# Altium PCB HAB_RADIO_BOARD.PcbDoc
Units mil, origin at the board's own origin, x right, y up, seen from the top; angles counter-clockwise.
Board outline 3149.61 x 1574.8 mil, 4 copper layers (Top Layer, GND Plane, PWR Plane, Bottom Layer), stack 61.811 mil thick; 5 components, 10 nets, 73 pads, 3 vias.
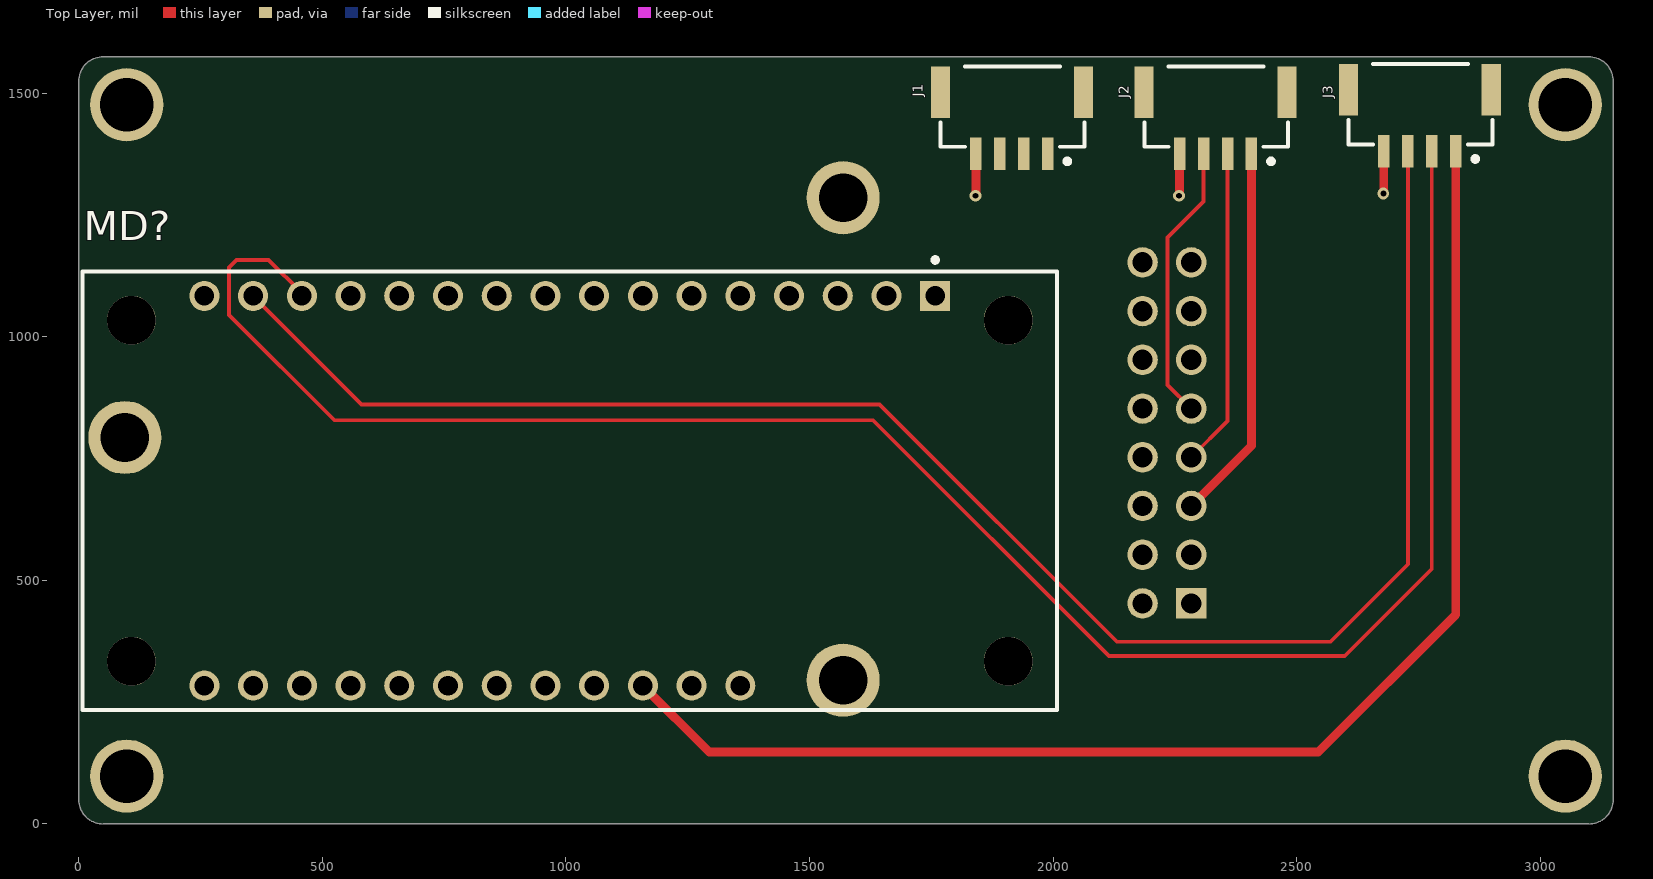
[diagram p0: Top Layer view]
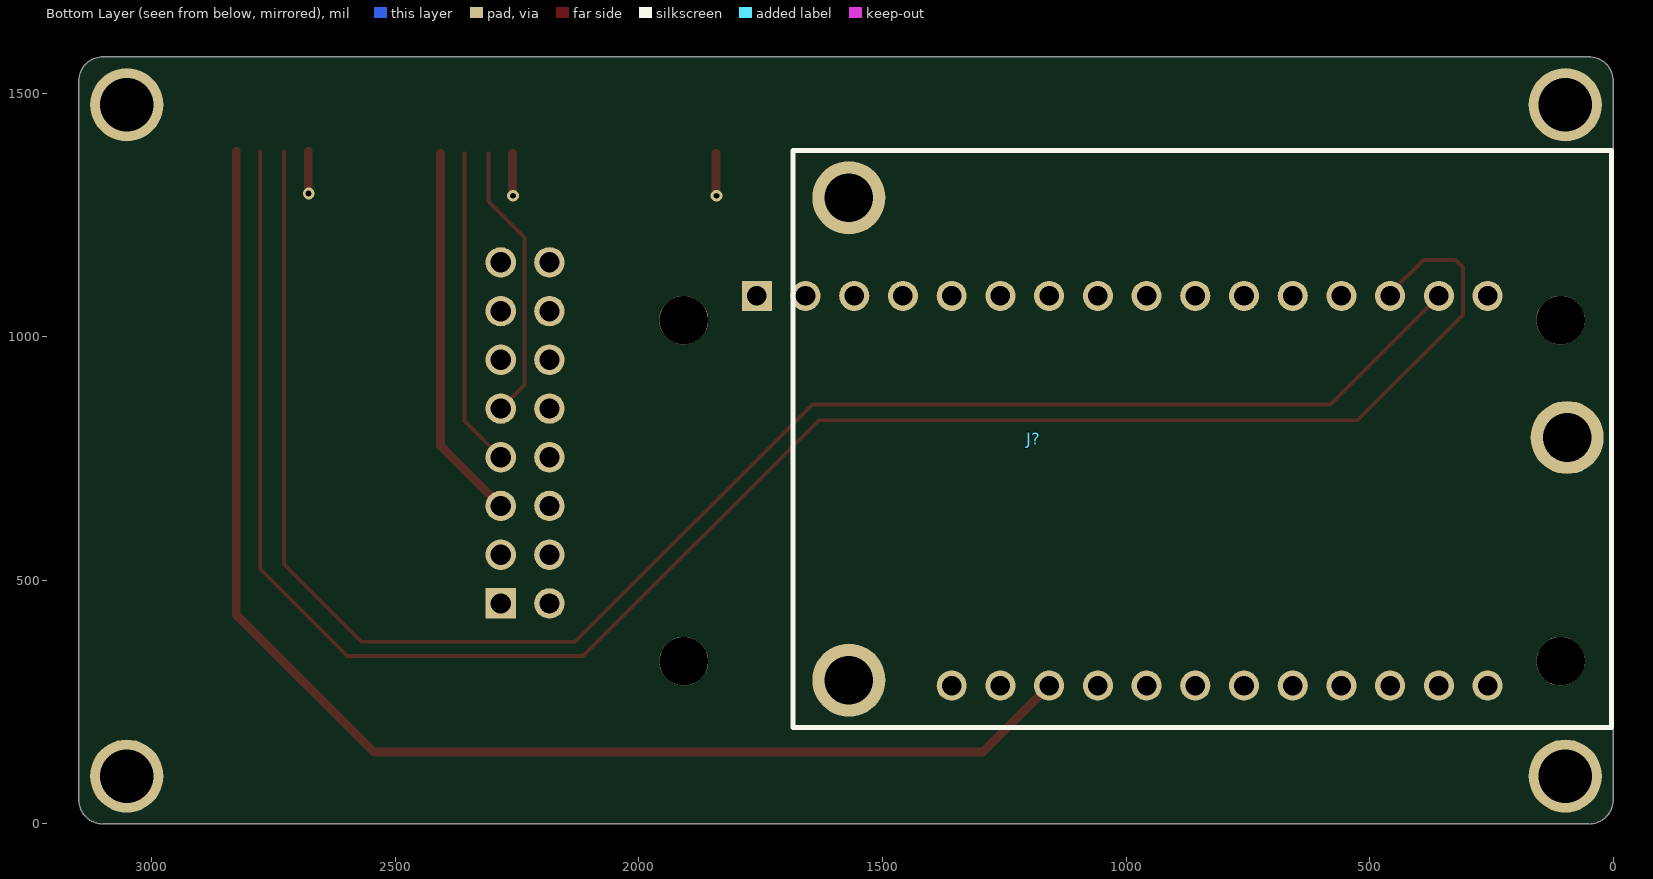
[diagram p1: Bottom Layer view, seen from below]
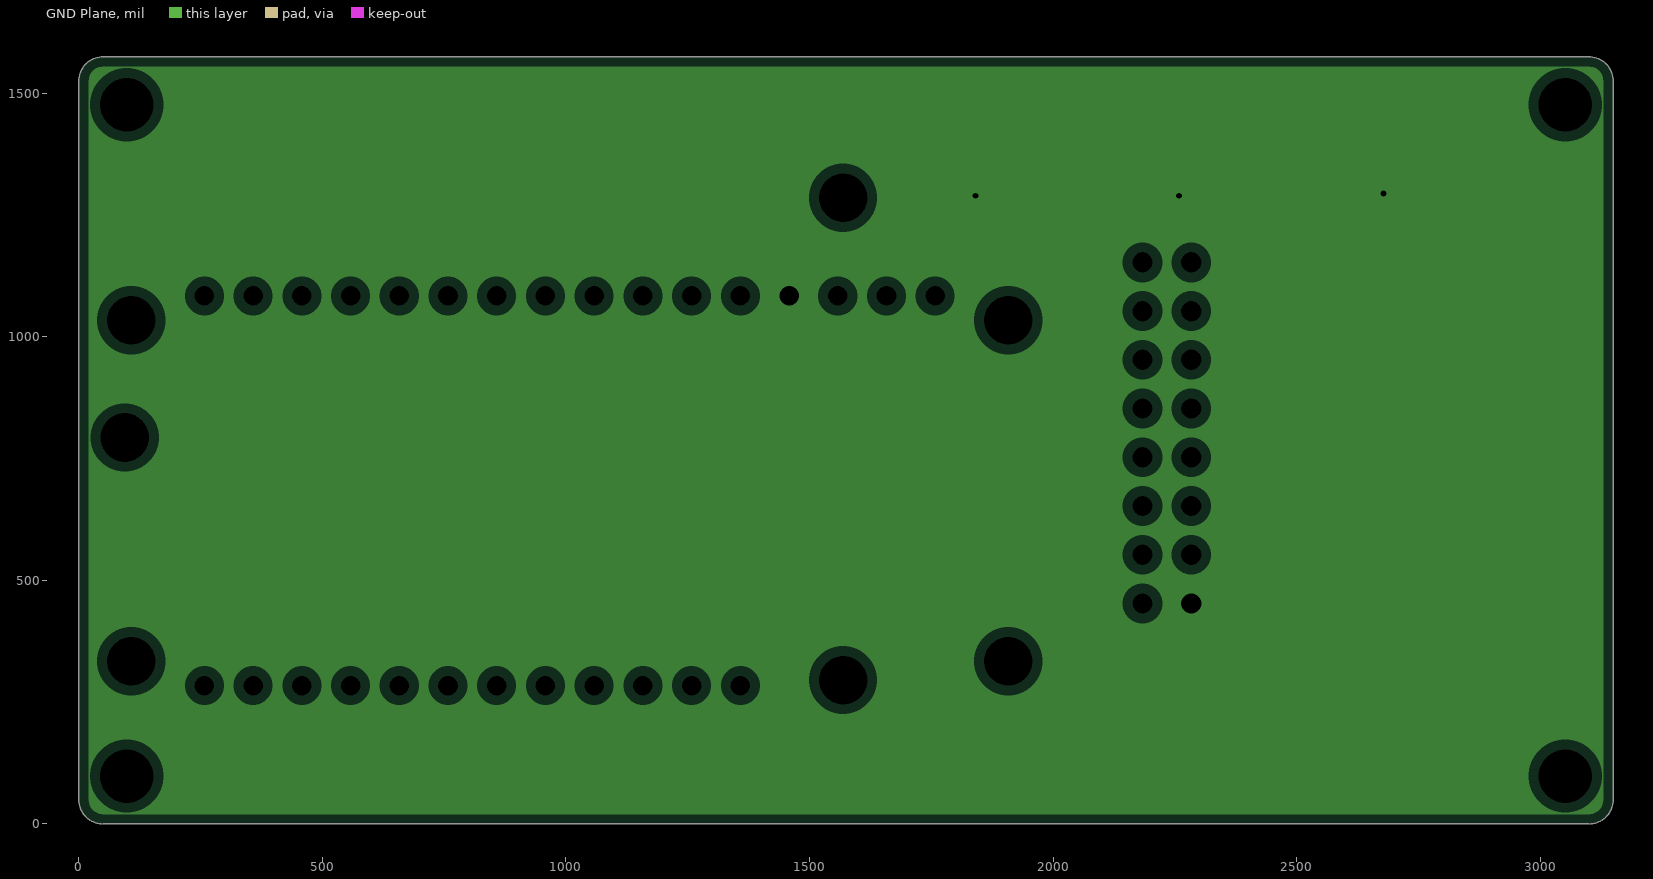
[diagram p2: GND Plane, clearances drawn from the general rule]
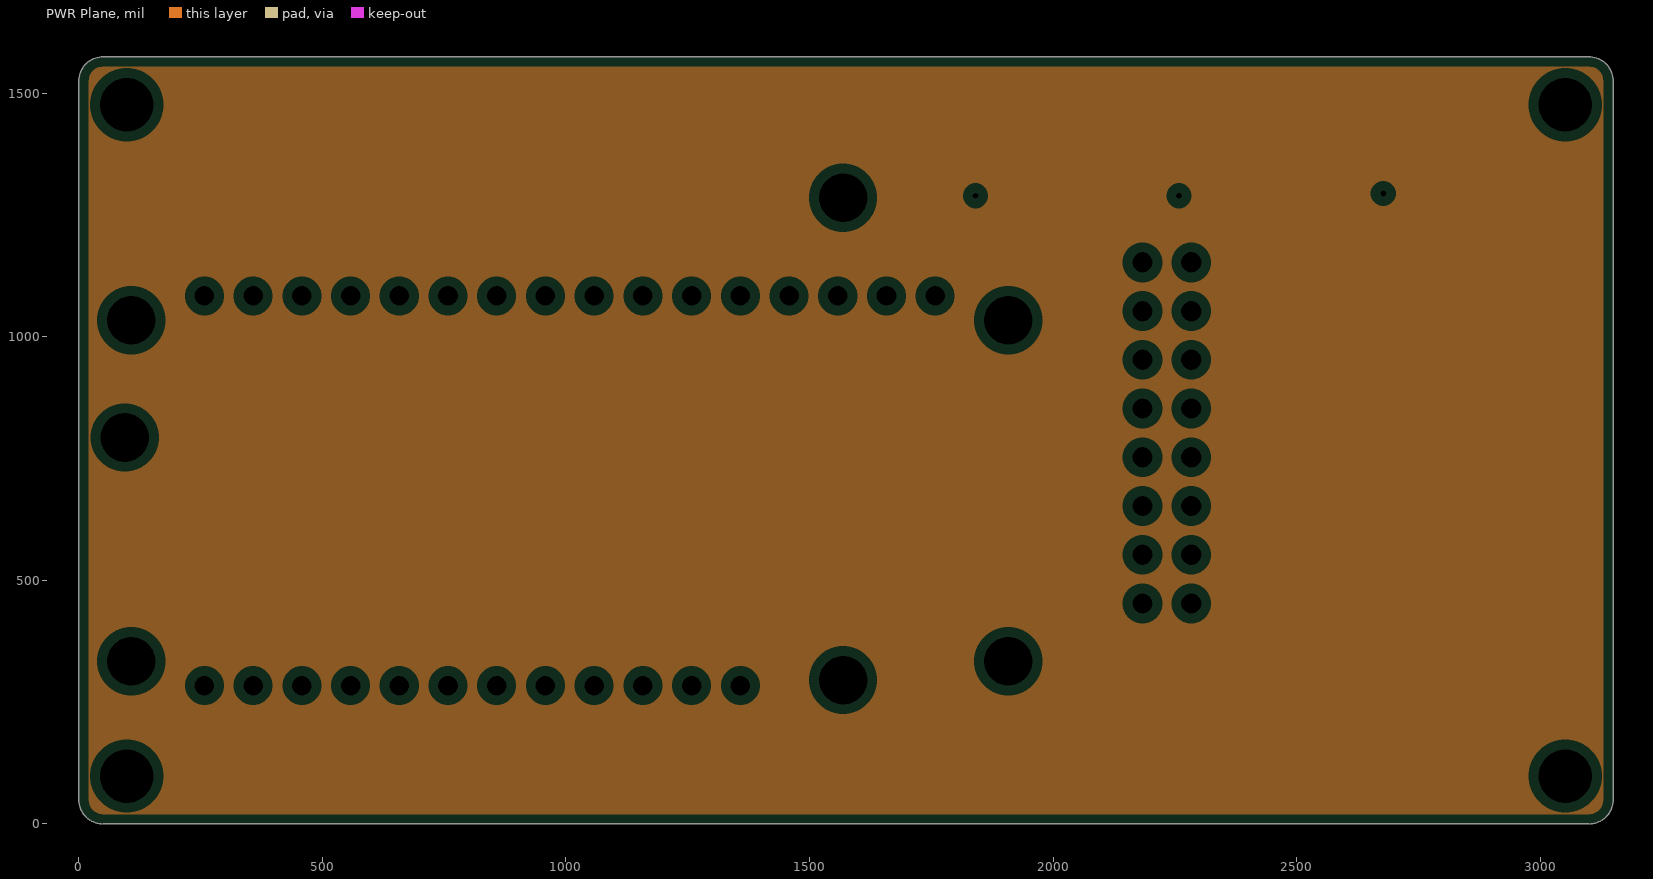
[diagram p3: PWR Plane, clearances drawn from the general rule]
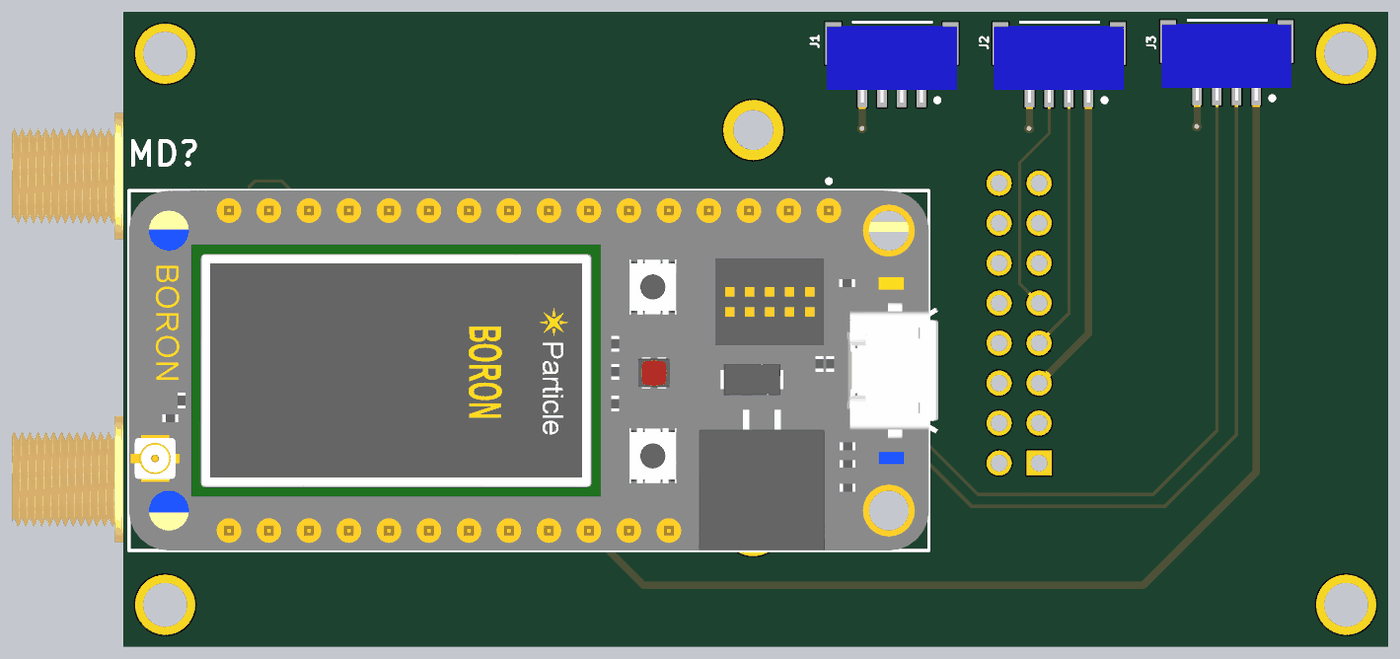
[diagram p4: 3D render of the assembled board from above, using the file's embedded part models]

## Layer stack, top to bottom
Top Solder: solder mask 1, SM-001, Dk 4
Top Layer: signal copper 1.378
Dielectric 2: prepreg 7.874, PP-006, Dk 4.1
GND Plane: plane copper 0.689, net GND
Dielectric 1: core 41.9291, Core-043, Dk 4.3
PWR Plane: plane copper 0.689
Dielectric 3: prepreg 7.874, PP-006, Dk 4.1
Bottom Layer: signal copper 1.378
Bottom Solder: solder mask 1, SM-001, Dk 4

## Board outline
0,50 0,1524.8 cw(c50,1524.8) 50,1574.8 3099.61,1574.8 cw(c3099.61,1524.8) 3149.61,1524.8 3149.61,50 cw(c3099.61,50) 3099.61,0 50,0 cw(c50,50)

## Design rules (kind name [scope] priority, off if disabled: settings)
Clearance [All] p1: gap=10 ignorepadtopadclearanceinfootprint=FALSE except(0: Arc-Hole Track-Hole SMDPad-Hole THPad-Hole Via-Hole Fill-Hole Poly-Hole Region-Hole Text-Hole)
PlaneClearance [All] p1: clearance=20
PlaneConnect [All] p1: planeconnectstyle=Relief reliefexpansion=20 reliefentries=4 reliefconductorwidth=10 reliefairgap=10
PolygonConnect [All] p1: connectstyle=Relief reliefconductorwidth=10 reliefentries=4 polygonreliefangle="90 Angle" airgapwidth=10
RoutingVias [All] p1: holewidth=12 width=24 viastyle="Through Hole" minholewidth=12 minwidth=24 maxholewidth=12 maxwidth=24
SolderMaskExpansion [All] p1: expansion=4 istentingtop=FALSE
Width [All] p1: maxlimit=100 minlimit=8 preferedwidth=8
28 further rules are at their usual default settings.

## Classes and differential pairs
component class "[05] RADIOS": J? MD?
component class "[04] CONNECTORS": J1 J2 J3

## Components (designator, comment, footprint, x,y, rotation, side; value= is the part's Value field where it differs from the comment)
J1 "JST-GH 4 Pos RA" SM04B-GHS-TB(LF)(SN)- 1989.17,1555.12 r180 top
J2 "JST-GH 4 Pos RA" SM04B-GHS-TB(LF)(SN)- 2407.09,1555.12 r180 top
J3 "JST-GH 4 Pos RA" SM04B-GHS-TB(LF)(SN)- 2826.38,1560.04 r180 top
J? "RFD900/X/+" RFD900 2283.46,452.76 r90 bottom
MD? "BRN402" FP-BRN402-0 1007.87,684.06 r270 top

## Footprints (in the part's own frame and the unit in brackets; to place one, negate y for a bottom-side part, rotate by r counter-clockwise, add the part's x,y. Pads: shape width x height; smd on the part's side, far side on the other; paste and mask are expansions set on the pad)
FP-BRN402-0 [mm]
  rect 1.57x1.57 hole 1.02 paste-1000 mask+0: 1(-10.16,19.05)
  round 1.57 hole 1.02 paste-1000 mask+0: 2(-10.16,16.51) 3(-10.16,13.97) 4(-10.16,11.43) 5(-10.16,8.89) 6(-10.16,6.35) 7(-10.16,3.81) 8(-10.16,1.27) 9(-10.16,-1.27) 10(-10.16,-3.81) 11(-10.16,-6.35) 12(-10.16,-8.89) 13(-10.16,-11.43) 14(-10.16,-13.97) 15(-10.16,-16.51) 16(-10.16,-19.05) 17(10.16,-19.05) 18(10.16,-16.51) 19(10.16,-13.97) 20(10.16,-11.43) 21(10.16,-8.89) 22(10.16,-6.35) 23(10.16,-3.81) 24(10.16,-1.27) 25(10.16,1.27) 26(10.16,3.81) 27(10.16,6.35) 28(10.16,8.89)
  round 2.54 hole 2.54 unplated paste-1000 mask+0: ""(-8.89,22.86) ""(-8.89,-22.86) ""(8.89,22.86) ""(8.89,-22.86)
  silkscreen extent -12.15,-25.4 11.43,25.4, body extent -11.53,-25.5 11.53,25.5, height 0.25
RFD900 [mm] "900MHz Data Modem"
  rect 1.59x1.59 hole 1.06 paste-1.59: 1(0,0)
  round 1.59 hole 1.06: 2(2.54,0) 4(7.62,0) 5(10.16,0) 6(12.7,0) 7(15.24,0) 8(17.78,0) 9(0,-2.54) 10(2.54,-2.54) 11(5.08,-2.54) 12(7.62,-2.54) 13(10.16,-2.54) 14(12.7,-2.54) 15(15.24,-2.54) 16(17.78,-2.54)
  round 1.59 hole 1.06 paste-1.59: 3(5.08,0)
  round 3.81 hole 2.54: GND(-4,-18.15) GND(8.65,-55.6) GND(21.15,-18.15)
  silkscreen extent -6.48,-57.91 23.62,-15.24, body extent -6.4,-65.2 23.6,-4.15, height 13.05
SM04B-GHS-TB(LF)(SN)- [mm] "JST-GH 4 POS RIGHT ANGLE"
  rect 0.6x1.7 smd: 1(0,4.55) 2(1.25,4.55) 3(2.5,4.55) 4(3.75,4.55)
  rect 1x2.7 smd: M(-1.85,1.35) M(5.6,1.35)
  silkscreen extent -1.91,0 5.59,5.08, body extent -2.25,0.25 6,5.1, height 4.35

## Part data
J1 J2 J3: library part SM04B-GHS-TB(LF)(SN)-, "JST-GH CONN HEADER SMD R/A 4 POS 1.25MM", Color=Natural, Manufacturer=JST, Supplier Part Number 1=455-1566-1-ND, Category=Connectors, ComponentLink1Description=https://datasheet.ciiva.com/6832/egh-6832463.pdf?src-supplier=Digi-Key, ComponentLink1URL=https://datasheet.ciiva.com/6832/egh-6832463.pdf?src-supplier=Digi-Key, Connector Type="Outer Shroud Contact", Contact Plating=Tin, Fastening Type=Ramp, Manufacturer Part Number=SM04B-GHS-TB(LF)(SN)-, Mount="Surface Mount", Number of Positions=4, Number of Rows=1, Packaging="Cut Tape", Pitch=0.049inch, Pricing 1="1=0.45000, 10=0.42300, 100=0.32440, 500=0.28212, 1000=0.23274 (USD)", RoHS=Yes, Stock 1=34258, Supplier 1=Digi-Key, Termination=Solder
J?: library part RFD900, "900MHz Data Modem"
MD?: library part CMP-201502-000001-1, "BORON LTE", Manufacturer=Particle, Max Frequency=3000MHz, Max Supply Voltage=4.4V, Min Supply Voltage=3V, Nominal Supply Current=70-100000uA, Temperature="-20°C to +60°C", Temperature Range High=+60°C, Temperature Range Low=-20°C, Automotive=No, Bandwidth=2302MHz, Category=UNK, ComponentLink2Description=Datasheet, ComponentLink2URL=https://docs.particle.io/assets/pdfs/datasheets/boron-datasheet.pdf, Data Rate=2000kbits/s, Device Class L1="Integrated Circuits (ICs)", Device Class L2="RF Semiconductors and Devices", Device Class L3=Transceivers, Digikey Description="BORON LTE", Interface=I2C,SPI,UART,USB, Lead Free=Yes, Manufacturer Part Number=BRN402, Number Of Adc Channels=6, Number Of Gpio=20, Octopart=https://octopart.com/brn402-particle-96116406, Package=BRN402, RoHS=TRUE

## Free pads (board coordinates)
  round 150 hole 110: M1(98.43,1476.38) M2(98.43,98.43) M3(3051.18,98.43) M4(3051.18,1476.38)

## Via types
v1: diameter 24, hole 12, Top Layer to Bottom Layer, tented both sides, 3 vias

## Nets (pads, with @x,y where several pads share a name; then routed paths per layer and width w, separated by ;. In a path a pad name is that pad's centre, name@x,y a point inside that pad or via, vN(x,y) a via of type N, cw(c..) or ccw(c..) an arc to the next point about the centre after c; other vN are vias at no path point)
5V0_2: J2.1 J?.3 | length 774.4
  Top Layer w18: J?.3 2407.09,776.38 J2.1
5V0_3: J3.1 MD?.26 | length 2793
  Top Layer w18: MD?.26 1294.29,147.64 2544.29,147.64 2826.38,429.72 J3.1
5V0_5: J1.1
GND: J1.4 J2.4 J3.4 J?.1 MD?.4 | length 258.3
  Top Layer w18: v1(1840.55,1289.37) 1841.54,1290.35 J1.4 ; v1@2259.45,1290.35 J2.4 ; v1@2678.74,1295.28 J3.4
  other v1: 2258.46,1289.37 2677.76,1294.29
MCU_RX_2: J2.3 J?.5 | length 573.8
  Top Layer w8: J?.5 2235.03,901.19 2235.03,1204.05 2308.66,1277.67 J2.3
MCU_RX_3: J3.3 MD?.15 | length 3577.9
  Top Layer w8: MD?.15 580.71,861.22 1643.7,861.22 2130.91,374.02 2568.9,374.02 2727.95,533.07 J3.3
MCU_RX_5: J1.3
MCU_TX_2: J2.2 J?.4 | length 654
  Top Layer w8: J?.4 2357.87,827.17 J2.2
MCU_TX_3: J3.2 MD?.14 | length 3978
  Top Layer w8: MD?.14 457.87,1089.6 389.64,1157.84 323.63,1157.84 308.21,1142.42 308.21,1045.13 524.62,828.73 1630.24,828.73 2114.48,344.49 2598.43,344.49 2777.17,523.23 J3.2
MCU_TX_5: J1.2
pads on no net: J1.M J2.M J3.M J?.2 J?.6 J?.7 J?.8 J?.9 J?.10 J?.11 J?.12 J?.13 J?.14 J?.15 J?.16 J?.GND MD?. MD?.1 MD?.2 MD?.3 MD?.5 MD?.6 MD?.7 MD?.8 MD?.9 MD?.10 MD?.11 MD?.12 MD?.13 MD?.16 MD?.17 MD?.18 MD?.19 MD?.20 MD?.21 MD?.22 MD?.23 MD?.24 MD?.25 MD?.27 MD?.28

## Polygon pours and split planes (outlines as drawn)
GND on GND Plane (split plane): 3104.3,1554.43 3108.87,1553.33 3113.22,1551.53 3117.24,1549.07 3120.81,1546.01 3123.87,1542.43 3126.33,1538.42 3128.13,1534.07 3129.23,1529.49 3129.56,1525.31 3129.51,1524.8 3129.51,50 3129.56,49.5 3129.23,45.31 3128.13,40.73 3126.33,36.38 3123.87,32.37 3120.81,28.79 3117.24,25.74 3113.22,23.28 3108.87,21.48 3104.3,20.38 3100.11,20.05 3099.61,20.1 50,20.1 49.5,20.05 45.31,20.38 40.73,21.48 36.38,23.28 32.37,25.74 28.79,28.79 25.74,32.37 23.28,36.38 21.48,40.73 20.38,45.31 20.05,49.5 20.1,50 20.1,1524.8 20.05,1525.31 20.38,1529.49 21.48,1534.07 23.28,1538.42 25.74,1542.43 28.79,1546.01 32.37,1549.07 36.38,1551.53 40.73,1553.33 45.31,1554.43 49.5,1554.76 50,1554.71 3099.61,1554.71 3100.11,1554.76
no net on PWR Plane (split plane): 3104.3,1554.43 3108.87,1553.33 3113.22,1551.53 3117.24,1549.07 3120.81,1546.01 3123.87,1542.43 3126.33,1538.42 3128.13,1534.07 3129.23,1529.49 3129.56,1525.31 3129.51,1524.8 3129.51,50 3129.56,49.5 3129.23,45.31 3128.13,40.73 3126.33,36.38 3123.87,32.37 3120.81,28.79 3117.24,25.74 3113.22,23.28 3108.87,21.48 3104.3,20.38 3100.11,20.05 3099.61,20.1 50,20.1 49.5,20.05 45.31,20.38 40.73,21.48 36.38,23.28 32.37,25.74 28.79,28.79 25.74,32.37 23.28,36.38 21.48,40.73 20.38,45.31 20.05,49.5 20.1,50 20.1,1524.8 20.05,1525.31 20.38,1529.49 21.48,1534.07 23.28,1538.42 25.74,1542.43 28.79,1546.01 32.37,1549.07 36.38,1551.53 40.73,1553.33 45.31,1554.43 49.5,1554.76 50,1554.71 3099.61,1554.71 3100.11,1554.76

## Silkscreen, mask and mechanical layers (free items; w line width, h text height)
Board Outline:
  lines w12: 0,50 ccw(c50,50) 50,0 3099.61,0 ccw(c3099.61,50) 3149.61,50 3149.61,1524.8 ccw(c3099.61,1524.8) 3099.61,1574.8 50,1574.8 ccw(c50,1524.8) 0,1524.8 0,433.07 0,50